# EAGLE board Schematics-1 (EAGLE 7.5.0)
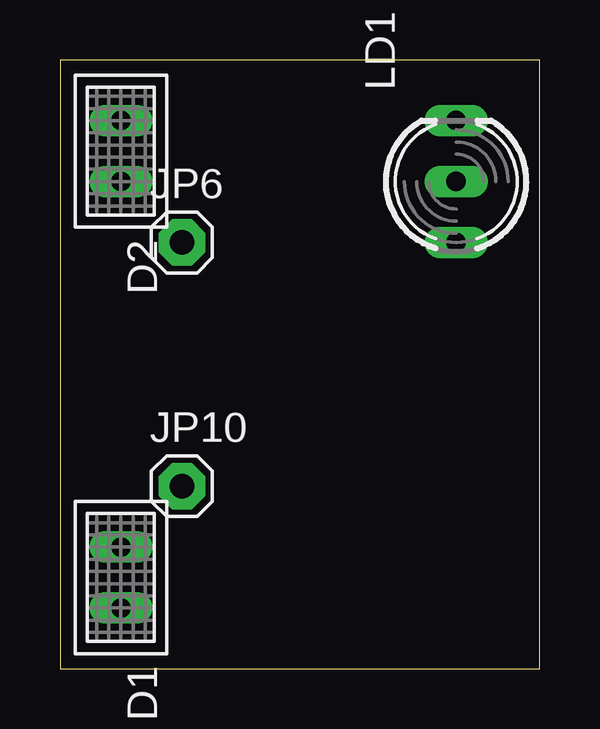
[diagram p0: board, top side]
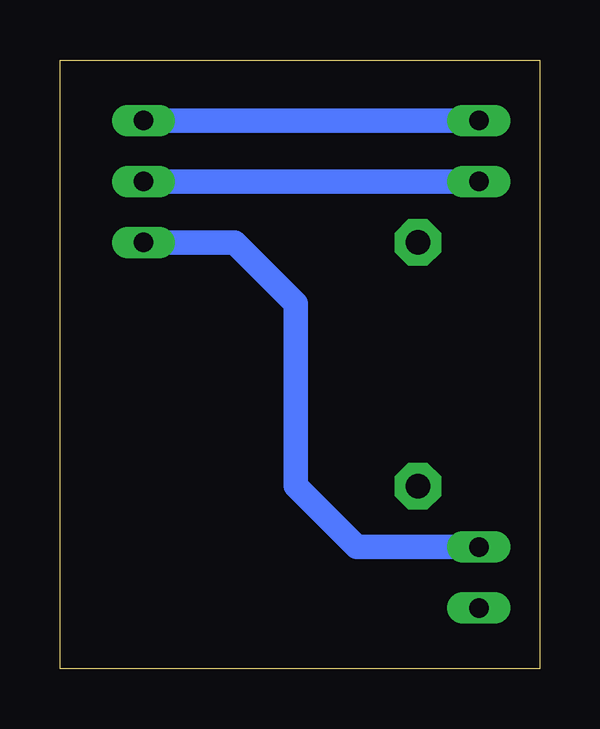
[diagram p1: board, bottom side, seen from below]

Size 19.99 x 25.39 mm. Coordinates in mm from the lower left corner, seen from the top.
Outline: 0,0 19.99,0 19.99,25.39 0,25.39 0,0
Copper layers (1*16): Top 0.035mm / dielectric 1.5mm / Bottom 0.035mm
Design rules "default": minimum track width 10mil, minimum drill 24mil, track to track 8mil, track to pad 8mil, pad to pad 8mil, via to via 8mil, smd to smd 8mil, copper to edge 40mil, drill to drill 8mil, minimum pad ring 10mil, minimum via ring 8mil, stop-mask expansion 4mil, vias tented up to drill 0mil, thermal gap 10mil

## Footprints (pad centres in the part's own frame; a part is rotated, then mirrored left to right if it is on the bottom)
U57X32 = drill 0.813 long: A -1.27,0; K 1.27,0
1X01 = drill 1.016 pad 1.93 octagon: 1 0,0
DUOLED-C-5MM = drill 0.813 long: AR 2.54,0; AX -2.54,0; C 0,0

## Placement (x,y rotation side)
D1  U57X32  [U57X32]  2.54,3.81 270 top
D2  U57X32  [U57X32]  2.54,21.59 270 top
JP6  [1X01]  5.08,17.78 0 top
JP10  [1X01]  5.08,7.62 0 top
LD1  [DUOLED-C-5MM]  16.51,20.32 90 top

## Library data of the parts
D1 D2 LD1 = led
JP6 JP10 = adafruit

## Nets
N$1: D2.A LD1.AR
N$3: D2.K LD1.C
N$4: D1.A LD1.AX

## Tracks (layer width: path | path; a pad name or v marks a point on that pad's centre or on a via)
N$1
  Bottom 1.016: D2.A LD1.AR
N$3
  Bottom 1.016: D2.K LD1.C
N$4
  Bottom 1.016: D1.A 7.62,5.08 10.16,7.62 10.16,15.24 12.7,17.78 LD1.AX